# Altium PCB EEL3111C Lab 10 PCB.PcbDoc
Units mil, origin at the board's own origin, x right, y up, seen from the top; angles counter-clockwise.
Board outline 1410 x 1320 mil, 2 copper layers (Top Layer, Bottom Layer); 17 components, 17 nets, 55 pads, 10 vias.
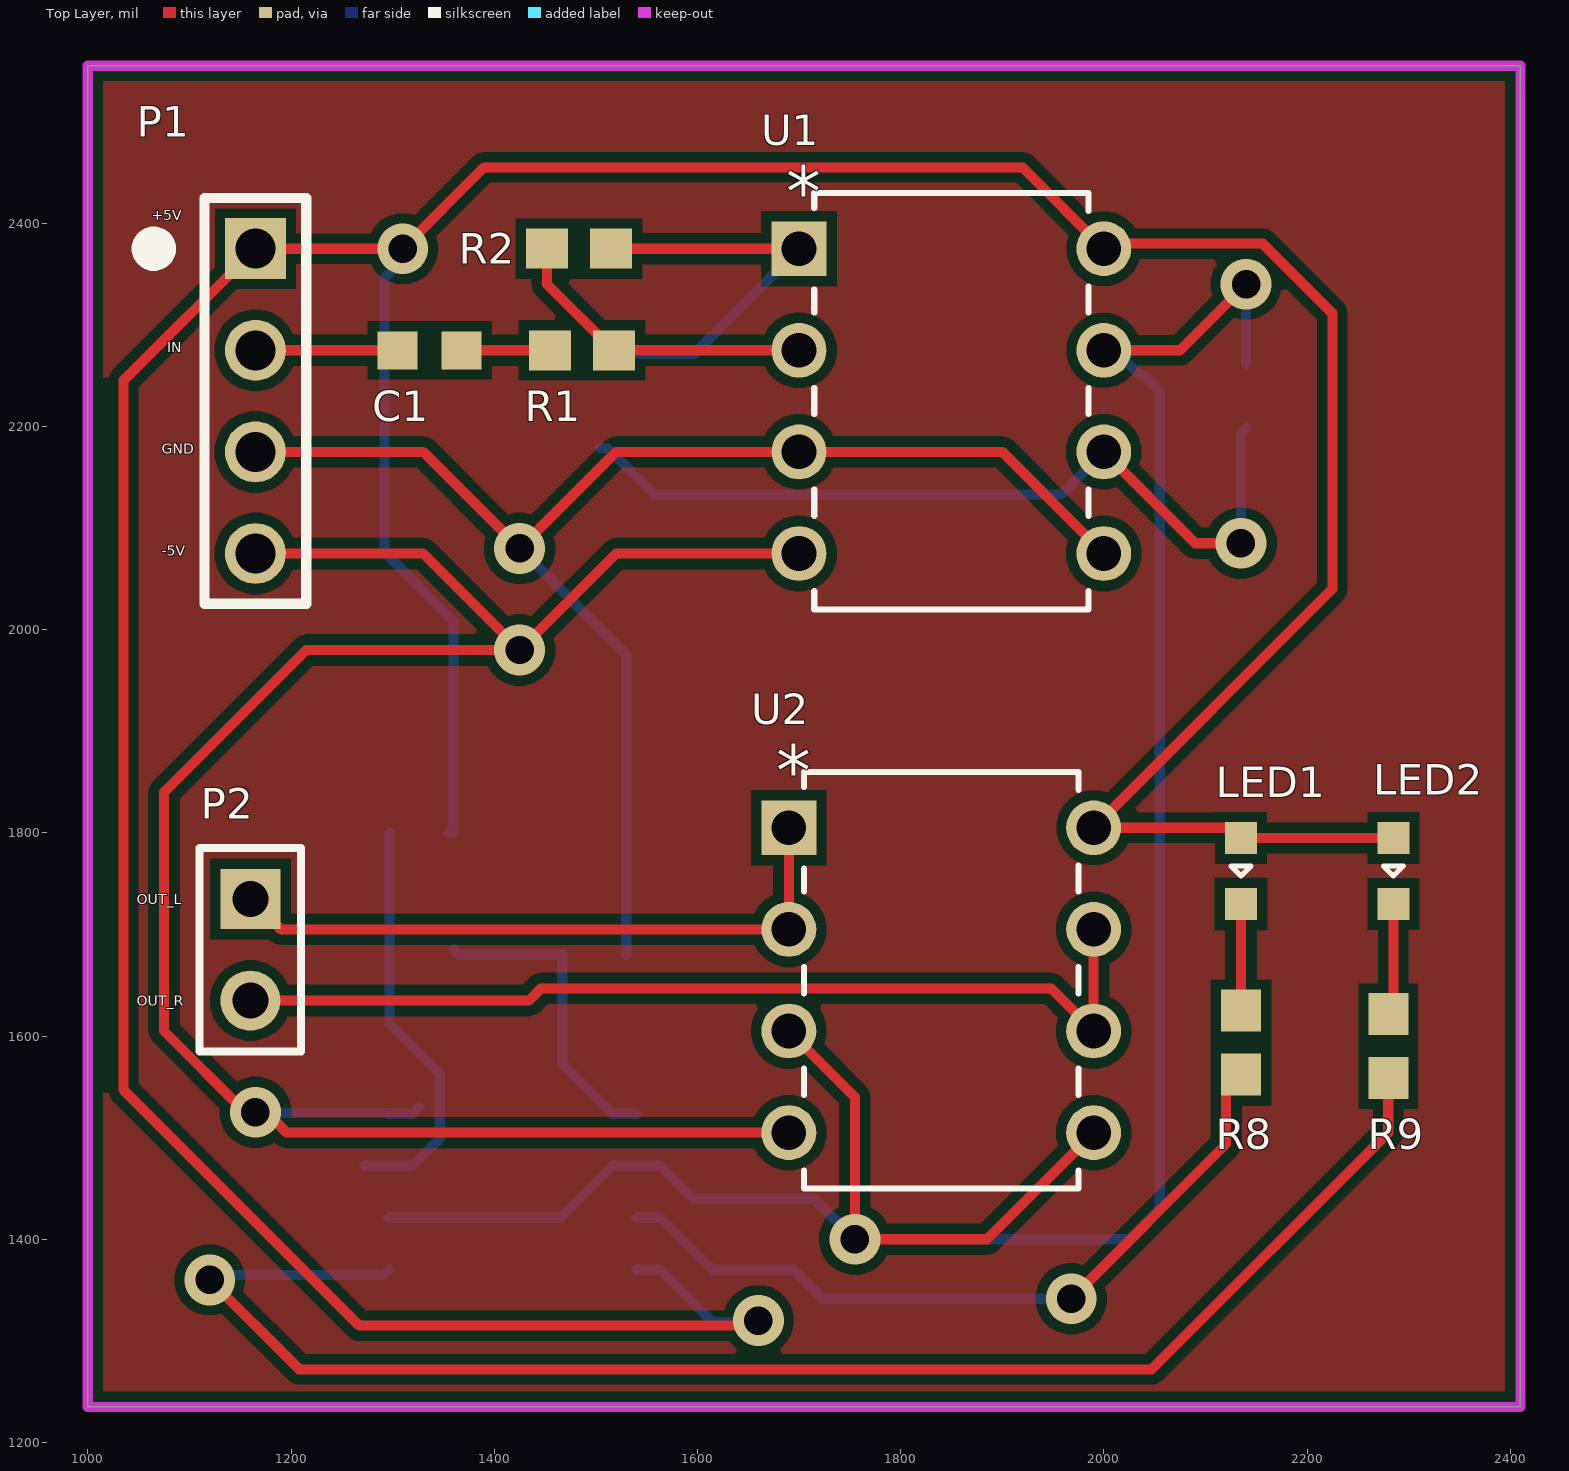
[diagram p0: Top Layer view]
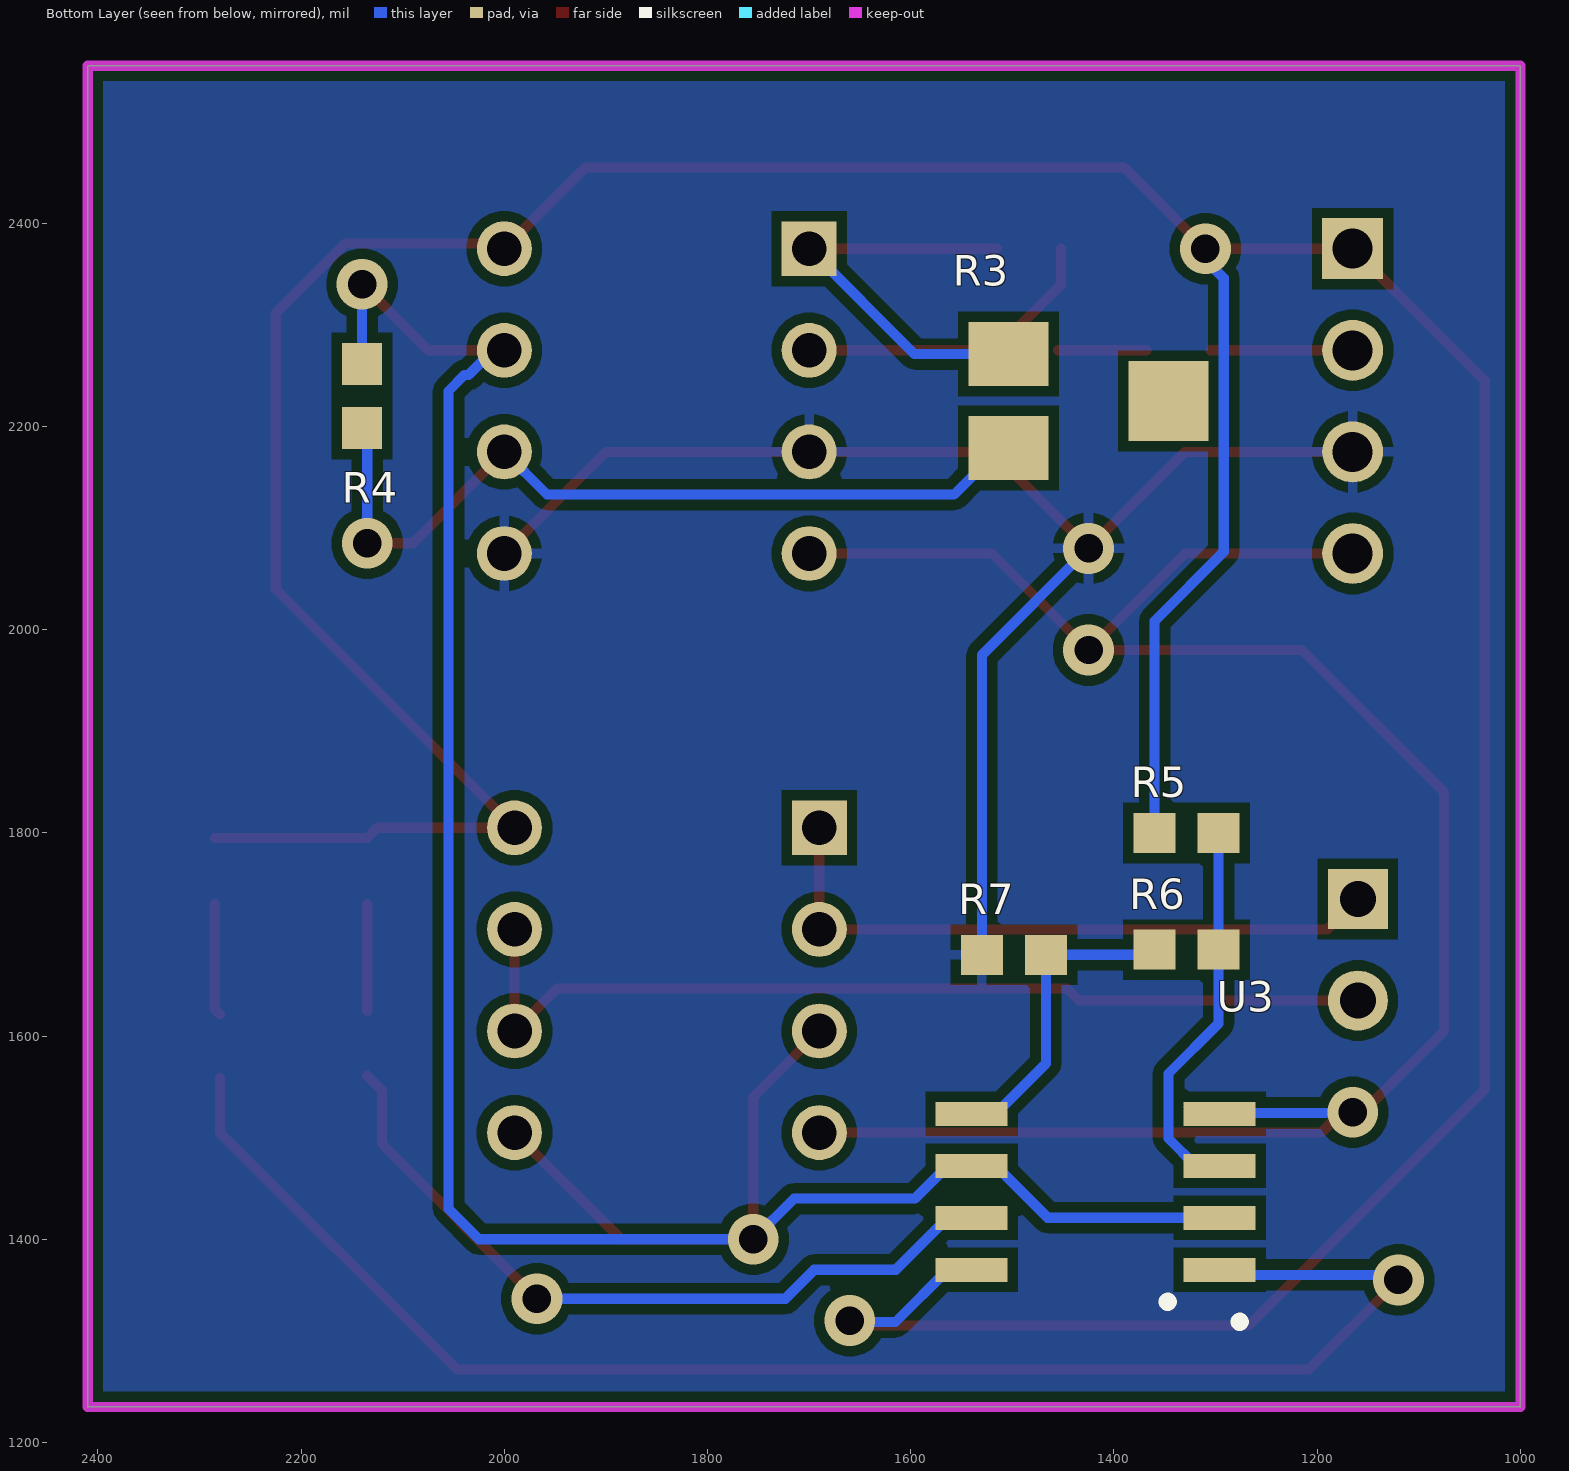
[diagram p1: Bottom Layer view, seen from below]

## Layer stack, top to bottom
Top Solder: solder mask 0.4, Solder Resist, Dk 3.5
Top Layer: signal copper 1.4
Dielectric 1: dielectric 12.6, FR-4, Dk 4.8
Bottom Layer: signal copper 1.4
Bottom Solder: solder mask 0.4, Solder Resist, Dk 3.5

## Board outline
1000,1235 1000,2555 2410,2555 2410,1235

## Design rules (kind name [scope] priority, off if disabled: settings)
Clearance [All] p1: gap=10 ignorepadtopadclearanceinfootprint=FALSE except(0: Arc-Hole Track-Hole SMDPad-Hole THPad-Hole Via-Hole Fill-Hole Poly-Hole Region-Hole Text-Hole; 5: Track-Track Track-SMDPad SMDPad-SMDPad; 7: Track-Via)
HoleSize [All] p1: absolutevalues=TRUE maxlimit=150 minlimit=10 maxpercent=80.000 minpercent=20.000
MinimumAnnularRing [All] p1: minimumring=7
MinimumSolderMaskSliver [All] p1: minsoldermaskwidth=1
PolygonConnect [All] p1: connectstyle=Relief reliefconductorwidth=10 reliefentries=4 polygonreliefangle="90 Angle" airgapwidth=10
RoutingVias [All] p1: holewidth=10 width=22 viastyle="Through Hole" minholewidth=10 minwidth=22 maxholewidth=100 maxwidth=150
SilkToSolderMaskClearance [IsPad] p1: minsilkscreentomaskgap=5 clearancetoexposedcopper=TRUE
SolderMaskExpansion [All] p1: expansion=4 istentingtop=FALSE
Width [All] p1: maxlimit=150 minlimit=8 preferedwidth=10
27 further rules are at their usual default settings.

## Classes and differential pairs
component class "EEL3111C Lab 10 Schematic": C1 LED1 P1 P2 R1 R3 R4 R5 R6 R8 R9 U1 U2 U3

## Components (designator, comment, footprint, x,y, rotation, side; value= is the part's Value field where it differs from the comment)
C1 "Cap" CAPC0603 1336.5,2275 r0 top value=100nF
LED1 "LED" LED0603 2135,1762.52 r270 top
LED2 "LED" LED0603 2285,1762.48 r270 top
P1 "1x4 0.1in Header" "1x4 0.1in Header" 1165,2375 r0 top
P2 "Header 2" HDR1X2 1160,1735 r270 top
R1 "Res" RES0603 1486.5,2275 r0 top value=10k
R2 "Res" RES0603 1483.5,2375 r0 top value=120k
R3 "Pot" ST4ETA103 1425,2225 r270 bottom value=3.3k
R4 "Res" RES0603 2140,2230 r90 bottom value=15k
R5 "Res" RES0603 1328.5,1800 r180 bottom value=330
R6 "Res" RES0603 1328.5,1685 r0 bottom value=1k
R7 "Res" RES0603 1498.5,1680 r0 bottom value=330 (schematic designator R8)
R8 "Res" RES0603 2135,1593.5 r270 top value=2.2k (schematic designator R7)
R9 "Res" RES0603 2280,1590 r270 top value=2.2k
U1 "TLV272IPG4" P8_TEX 1700,2375 r0 top
U2 "TLV272IPG4" P8_TEX 1690,1805 r0 top
U3 "LM393DR" LM393DR 1425.83,1220.39 r0 bottom

## Footprints (in the part's own frame and the unit in brackets; to place one, negate y for a bottom-side part, rotate by r counter-clockwise, add the part's x,y. Pads: shape width x height; smd on the part's side, far side on the other; paste and mask are expansions set on the pad)
"1x4 0.1in Header" [mil]
  rect 60x60 hole 39.37: 1(0,0)
  round 60 hole 39.37: 2(0,-100) 3(0,-200) 4(0,-300)
  silkscreen extent -110,-349 50,50
CAPC0603 [mm] "Chip Capacitor, 2-Leads, Body 1.60x0.80mm, IPC Medium Density"
  rect 1x0.95 smd: 1(-0.8,0) 2(0.8,0)
  body extent -0.88,-0.48 0.87,0.48, height 0.8
HDR1X2 [mm] "Connector; Header; 2 Position"
  rect 1.5x1.5 hole 0.9: 1(0,0)
  round 1.5 hole 0.9: 2(2.54,0)
  silkscreen extent -1.27,-1.27 3.81,1.27
LED0603 [mm] "Chip LED, 2-Leads, Body 1.60x0.80mm, IPC Medium Density"
  rect 0.8x0.8 smd: A(-0.825,0) C(0.825,0)
  silkscreen extent -0.12,-0.25 0.13,0.25, body extent -0.88,-0.48 0.87,0.47, height 0.8
LM393DR [mm]
  rect 1.8x0.6 smd: 1(-3.3,-3.8) 2(-3.3,-5.1) 3(-3.3,-6.4) 4(-3.3,-7.7) 5(2.9,-7.7) 6(2.9,-6.4) 7(2.9,-5.1) 8(2.9,-3.8)
  silkscreen extent -3.9,-3.1 -1.9,-2.4, body extent -3.1,-9.1 2.7,-2.4, height 2
P8_TEX [mil]
  rect 54x54 hole 34 mask+0: 1(0,0)
  round 54 hole 34 mask+0: 2(0,-100) 3(0,-200) 4(0,-300) 5(300,-300) 6(300,-200) 7(300,-100) 8(300,0)
  silkscreen extent 15,-355 285,55, body extent -5,-350 315,50, height 205
RES0603 [mm] "Chip Resistor, 2-Leads, Body 1.60x0.80mm, IPC Medium Density"
  rect 1.05x1 smd: 1(-0.8,0) 2(0.8,0)
  body extent -0.88,-0.48 0.87,0.47, height 0.8
ST4ETA103 [mm] "TRIMMER 10K OHM 0.25W SMD"
  rect 1.6x2 smd: 1(-1.175,-2) 2(1.175,-2)
  rect 2x2 smd: 3(0,2)
  body extent -2.5,-2.3 2.5,2.3, height 2.3

## Part data
C1: Supplier Part Number 1=1276-1000-1-ND, Supplier 1=Digi-Key
LED1 LED2: Color=Red, Supplier Part Number 1=754-1122-1-ND, Supplier 1=Digi-Key
P2: "Header, 2-Pin", LatestRevisionDate=17-Jul-2002, LatestRevisionNote="Re-released for DXP Platform.", Publisher="Altium Limited"
R1 R2 R4 R5 R6 R7 R8 R9: Supplier Part Number 1=RMCF0603JT10K0CT-ND, Supplier 1=Digi-Key
R3: library part Potentiometer, "Potentiometer", Supplier Part Number 1=ST4ETA103CT-ND, Supplier 1=Digi-Key
U1: "No Description Available", Mfr_Name="Texas Instruments", Copyright="Copyright (C) 2021 Ultra Librarian. All rights reserved.", Digi-Key_Part_Number_1=TLV272IPG4-ND, Digi-Key_Part_Number_2=296-12671-5-ND, Manufacturer_Part_Number=TLV272IPG4, RefDes=RefDes, Type=DEV
U2: "No Description Available", Mfr_Name="Texas Instruments", Supplier Part Number 1=TLV272IPG4-ND, Copyright="Copyright (C) 2021 Ultra Librarian. All rights reserved.", Digi-Key_Part_Number_1=TLV272IPG4-ND, Digi-Key_Part_Number_2=296-12671-5-ND, Manufacturer_Part_Number=TLV272IPG4, RefDes=RefDes, Supplier 1=Digi-Key, Type=DEV
U3: "LM393DR Comparator", Supplier Part Number 1=296-1015-1-ND, Supplier 1=Digi-key

## Via types
v1: diameter 50, hole 28, Top Layer to Bottom Layer, 10 vias

## Nets (pads, with @x,y where several pads share a name; then routed paths per layer and width w, separated by ;. In a path a pad name is that pad's centre, name@x,y a point inside that pad or via, vN(x,y) a via of type N, cw(c..) or ccw(c..) an arc to the next point about the centre after c; other vN are vias at no path point)
+5: LED1.A LED2.A P1.1 R5.1 U1.8 U2.8 U3.8 | length 4422.1
  Top Layer w10: v1(1660,1320) 1655,1315 1267.33,1315 1035,1547.33 1035,2245 P1.1 v1(1310,2375) 1390,2455 1920,2455 U1.8 2005,2380 2156.57,2380 2225,2311.57 2225,2040 U2.8 2125,1805 LED1.A LED1.A LED2.A
  Bottom Layer w10: v1(1310,2375) 1310,2364.18 1291.89,2346.07 1291.89,2076.69 1360,2008.58 R5.1 R5.1@1355,1800 ; U3.8 1563.62,1370 1615,1318.62 1658.62,1318.62 v1(1660,1320)
-5: P1.4 U1.4 U2.4 U3.4 | length 2082.6
  Top Layer w10: P1.4 1330,2075 v1(1425,1980) ; U2.4 1195.82,1505 1175.82,1525 1155,1525 1075,1605 1075,1840 1215,1980 v1(1425,1980) ; U1.4 1520,2075 v1(1425,1980)
  Bottom Layer w10: v1(1165,1525) 1165.73,1524.27 1295.18,1524.27 U3.4 1319.53,1523.54 U3.4@1326.34,1530.36 ; U2.4@1690,1500.3 U2.4
GND: P1.3 R7.2 U1.3 U1.5 | length 1398.6
  Top Layer w10: P1.3 1330,2175 v1(1425,2080) 1520,2175 U1.3 1900,2175 U1.5
  Bottom Layer w10: v1(1425,2080) 1530,1975 R7.2
IN1: R1.2 R2.1 U1.2 | length 309.9
  Top Layer w10: R2.1 1452.01,2340 1517.01,2275 R1.2 U1.2
IN2: R3.2 R4.1 U1.6 | length 820.5
  Top Layer w10: U1.6 2090,2085 v1(2135,2085)
  Bottom Layer w10: R3.2 1511.61,2178.74 1557.35,2133 1958,2133 U1.6 ; v1(2135,2085) 2135,2193.5 R4.1
INPUT: C1.1 P1.2 | length 140
  Top Layer w10: P1.2 C1.1
NetC1_2: C1.2 R1.1 | length 87
  Top Layer w10: C1.2 R1.1
NetLED1_C: LED1.C R8.1 | length 105
  Top Layer w10: R8.1 LED1.C
NetLED2_C: LED2.C R9.1 | length 110.6
  Top Layer w10: R9.1 2285,1626.5 LED2.C
OUT1: R2.2 R3.1 U1.1 | length 424.2
  Top Layer w10: R2.2 U1.1
  Bottom Layer w10: R3.1 1596.26,2271.26 U1.1
OUT2: R4.2 U1.7 U2.3 U2.5 U3.2 U3.6 | length 2455.1
  Top Layer w10: U2.3 1755,1540 v1(1755,1400) 1885,1400 U2.5 ; U1.7 2075,2275 v1(2140,2340)
  Bottom Layer w10: U3.2 1465.2,1421.18 1516.38,1472.36 U3.6 1563.62,1472.36 1595.98,1440 1715,1440 v1(1755,1400) 2025,1400 2055,1430 2055,2235 2039.21,2250.79 2035.19,2250.79 2010.98,2275 U1.7 ; R4.2 v1(2140,2340)
OUT3: R8.2 U3.7 | length 749.7
  Top Layer w10: v1(1968.01,1341.49) 2120.31,1493.8 2120.31,1546.34 R8.2@2135,1561.02
  Bottom Layer w10: U3.7 1563.62,1421.18 1614.8,1370 1695,1370 1723.51,1341.49 v1(1968.01,1341.49)
OUT4: R9.2 U3.1 | length 1526.5
  Top Layer w10: v1(1120,1360) 1208,1272 2047,1272 2280,1505 R9.2
  Bottom Layer w10: v1(1120,1360) 1125,1365 1290.91,1365 U3.1
OUT_L: P2.1 U2.1 U2.2 | length 642.4
  Top Layer w10: P2.1 1190,1705 U2.2 U2.1
OUT_R: P2.2 U2.6 U2.7 | length 952.4
  Top Layer w10: P2.2 1434.34,1635 1446.34,1647 1948,1647 U2.6 U2.7
VD1: R5.2 R6.1 U3.3 | length 406.4
  Bottom Layer w10: U3.3@1272.28,1472.36 U3.3 1319.53,1472.36 1346.34,1499.17 1346.34,1563.25 1297.01,1612.58 R6.1 R5.2
VD2: R6.2 R7.1 U3.5 | length 309.6
  Bottom Layer w10: R6.2 1365,1680 R7.1 1467.01,1572.91 1516.38,1523.54 U3.5
pads on no net: R3.3

## Polygon pours and split planes (outlines as drawn)
no net on Top Layer "NONET_L01_P000" (solid, pour order 0): 2410,2555 1000,2555 1000,1250 2410,1250
GND on Bottom Layer "GND_L02_P001" (solid, pour order 1): 2415,2555 2415,1250 1000,1250 1000,2555

## Keep-outs
Keep-Out Layer:
  lines w10: 1000,1235 1352.5,1235 2057.5,1235 2410,1235 2410,2555 1000,2555 1000,1235

## Silkscreen, mask and mechanical layers (free items; w line width, h text height)
Top Overlay:
  text "+5V" at 1063,2403 h10
  text "IN" at 1078,2273 h10
  text "GND" at 1073,2173 h10
  text "-5V" at 1073,2073 h10
  text "OUT_L" at 1048,1729.67 h10
  text "OUT_R" at 1048,1629.67 h10

## Text inside footprints (layer, text, board x,y; h text height)
U1: Top Overlay "*" at 1687.5,2407 h50; Mechanical 13 "*" at 1717.5,2350 h50
U2: Top Overlay "*" at 1677.5,1837 h50; Mechanical 13 "*" at 1707.5,1780 h50